# EAGLE board EvaporometerLite (EAGLE 9.5.2)

Size 160 x 100 mm. Coordinates in mm from the lower left corner, seen from the top.
Outline: 0,0 160,0 160,100 0,100 0,0
Copper layers (1*16): Top 0.035mm / dielectric 1.5mm / Bottom 0.035mm
Design rules "default": minimum track width 6mil, minimum drill 0.35mm, track to track 6mil, track to pad 6mil, pad to pad 6mil, via to via 6mil, smd to smd 6mil, copper to edge 40mil, drill to drill 6mil, minimum pad ring 10mil, minimum via ring 8mil, stop-mask expansion 4mil, vias tented up to drill 0mil, thermal gap 10mil

## Footprints (pad centres in the part's own frame; a part is rotated, then mirrored left to right if it is on the bottom)
SJ = smd 1.168 x 1.6: 1 -0.762,0; 2 0.762,0
1X10 = drill 1.016 long: 1 -11.43,0; 2 -8.89,0; 3 -6.35,0; 4 -3.81,0; 5 -1.27,0; 6 1.27,0; 7 3.81,0; 8 6.35,0; 9 8.89,0; 10 11.43,0
0805 = smd 1.3 x 1.5: 1 -0.95,0; 2 0.95,0
FIDUCIAL_1MM = smd 1 x 1: 1 0,0
MSOP10 = smd 0.25 x 1: 1 -1,-2.113; 2 -0.5,-2.113; 3 0,-2.113; 4 0.5,-2.113; 5 1,-2.113; 6 1,2.113; 7 0.5,2.113; 8 0,2.113; 9 -0.5,2.113; 10 -1,2.113
MOUNTINGHOLE_2.5_PLATED = drill 2.5 pad 3.2: P$1 0,0
1X01 = drill 1.016 octagon: 1 0,0
SMD2,54-5,08 = smd 2.54 x 5.08: 1 0,0
SO16-1 = smd 0.762 x 1.524: 1 -4.445,-4.775; 2 -3.175,-4.775; 3 -1.905,-4.775; 4 -0.635,-4.775; 5 0.635,-4.775; 6 1.905,-4.775; 7 3.175,-4.775; 8 4.445,-4.775; 9 4.445,4.775; 10 3.175,4.775; 11 1.905,4.775; 12 0.635,4.775; 13 -0.635,4.775; 14 -1.905,4.775; 15 -3.175,4.775; 16 -4.445,4.775
1X06 = drill 1.016 long: 1 -6.35,0; 2 -3.81,0; 3 -1.27,0; 4 1.27,0; 5 3.81,0; 6 6.35,0
1X04 = drill 1.016 long: 1 -3.81,0; 2 -1.27,0; 3 1.27,0; 4 3.81,0
R1206 = smd 1.6 x 1.803: 1 -1.422,0; 2 1.422,0
DS-01 = drill 0.813 long: 1 0,-3.81; 2 0,3.81
SJ_2W = smd 1.27 x 2.54: 1 -2.54,0; 2 0,0; 3 2.54,0

## Placement (x,y rotation side)
0X4A  [SJ]  -52.07,59.69 0 top  (outside the outline)
0X4B  [SJ]  -16.51,64.77 0 top  (outside the outline)
0X48  [SJ]  -22.86,64.77 0 top  (outside the outline)
0X49  [SJ]  -29.21,64.77 0 top  (outside the outline)
2.5V_OUT  [SJ]  -20.32,59.69 0 top  (outside the outline)
5V_OUT  [SJ]  -39.37,59.69 0 top  (outside the outline)
10V_OUT  [SJ]  -30.48,59.69 0 top  (outside the outline)
ADS1  [1X10]  6.35,19.05 90 top
ADS1115-1:C1  1µF  [0805]  -50.8,12.7 0 top  (outside the outline)
ADS1115-1:C2  1µF  [0805]  -22.86,16.51 0 top  (outside the outline)
ADS1115-1:FB1  MMZ2012Y152B  [0805]  -24.13,12.7 0 top  (outside the outline)
ADS1115-1:FB2  MMZ2012Y152B  [0805]  -38.1,12.7 0 top  (outside the outline)
ADS1115-1:FID1  FIDUCIAL""  [FIDUCIAL_1MM]  -39.37,19.05 0 top  (outside the outline)
ADS1115-1:FID2  FIDUCIAL""  [FIDUCIAL_1MM]  -41.91,19.05 0 top  (outside the outline)
ADS1115-1:R1  10K  [0805]  -35.56,16.51 0 top  (outside the outline)
ADS1115-1:R3  10K  [0805]  -48.26,16.51 0 top  (outside the outline)
ADS1115-1:R4  10K  [0805]  -22.86,20.32 0 top  (outside the outline)
ADS1115-1:R5  10K  [0805]  -35.56,20.32 0 top  (outside the outline)
ADS1115-1:U1  ADS1115IDGST  [MSOP10]  -16.51,3.81 0 top  (outside the outline)
ADS1115-1:U$13  MOUNTINGHOLE2.5  [MOUNTINGHOLE_2.5_PLATED]  -21.59,2.54 0 top  (outside the outline)
ADS1115-1:U$14  MOUNTINGHOLE2.5  [MOUNTINGHOLE_2.5_PLATED]  -26.67,2.54 0 top  (outside the outline)
BRIDGE+_TSTPD  [1X01]  -27.94,49.53 0 top  (outside the outline)
DIP_SLEEP  [SJ]  -26.67,54.61 0 top  (outside the outline)
EXT_SUPP  [SJ]  -38.1,54.61 0 top  (outside the outline)
GND_TSTPD  WIREPADSMD2,54-5,08  [SMD2,54-5,08]  -20.32,25.4 0 top  (outside the outline)
IC1  INA125U  [SO16-1]  33.02,22.86 90 top
JP1  [1X06]  6.35,58.42 90 top
LOADCELL1  [1X04]  -19.05,44.45 0 top  (outside the outline)
R2  [R1206]  -15.24,54.61 0 top  (outside the outline)
S1  [DS-01]  -15.24,27.94 0 top  (outside the outline)
SEL_EXT_SUPP  [SJ_2W]  -36.83,44.45 0 top  (outside the outline)
SLEEP  [1X01]  -50.8,49.53 0 top  (outside the outline)
V_OUT_TSTPD  [1X01]  -43.18,49.53 0 top  (outside the outline)
VBG_OUT  [SJ]  -48.26,54.61 0 top  (outside the outline)
VREF  [SJ]  -45.72,59.69 0 top  (outside the outline)

## Library data of the parts
0X4A 0X4B 0X48 0X49 2.5V_OUT 5V_OUT 10V_OUT DIP_SLEEP EXT_SUPP SEL_EXT_SUPP VBG_OUT VREF = jumper
ADS1 BRIDGE+_TSTPD JP1 LOADCELL1 SLEEP V_OUT_TSTPD = pinhead
ADS1115-1:C1 ADS1115-1:C2 ADS1115-1:FB1 ADS1115-1:FB2 ADS1115-1:FID1 ADS1115-1:FID2 ADS1115-1:R1 ADS1115-1:R3-ADS1115-1:R5 ADS1115-1:U1 ADS1115-1:U$13 ADS1115-1:U$14 = microbuilder
GND_TSTPD = wirepad
IC1 = burr-brown; MF: TEXAS INSTRUMENT CONNECTORS; MPN: INA125U; OC_FARNELL: 1304375; OC_NEWARK: 80K5901
R2 = rcl; SPICEPREFIX: R
S1 = switch-dil; OC_FARNELL: unknown; OC_NEWARK: unknown

## Nets
A1: ADS1.8 ADS1115-1:U1.5
A2: ADS1.9 ADS1115-1:U1.6
A3: ADS1.10 ADS1115-1:U1.7
A+: IC1.6 LOADCELL1.1
A-: IC1.7 LOADCELL1.4
ADDR: 0X4A.2 0X4B.2 0X48.2 0X49.2 ADS1.5 ADS1115-1:R4.1 ADS1115-1:U1.1 JP1.5
ADS1115-1:GND: ADS1115-1:C1.1 ADS1115-1:FB2.2 ADS1115-1:R4.2 ADS1115-1:U1.3
ADS1115-1:VDD: ADS1115-1:C1.2 ADS1115-1:FB1.2 ADS1115-1:R1.1 ADS1115-1:R3.1 ADS1115-1:R5.1 ADS1115-1:U1.8
ALERT: ADS1.6 ADS1115-1:R5.2 ADS1115-1:U1.2
BRIDGE+: BRIDGE+_TSTPD.1 EXT_SUPP.1 LOADCELL1.2 VREF.1
GND: 0X48.1 ADS1.2 ADS1115-1:C2.2 ADS1115-1:FB2.1 GND_TSTPD.1 IC1.3 IC1.5 IC1.12 JP1.2 LOADCELL1.3 S1.1
N$16: JP1.6 SEL_EXT_SUPP.3
N$22: DIP_SLEEP.2 R2.1 S1.2
RG+: IC1.8
RG-: IC1.9
SCL: 0X4B.1 ADS1.3 ADS1115-1:R1.2 ADS1115-1:U1.10 JP1.3
SDA: 0X4A.1 ADS1.4 ADS1115-1:R3.2 ADS1115-1:U1.9 JP1.4
SLEEP: DIP_SLEEP.1 IC1.2 SLEEP.1
V_OUT: ADS1.7 ADS1115-1:U1.4 IC1.10 IC1.11 V_OUT_TSTPD.1
V_SUPP: 0X49.1 ADS1.1 ADS1115-1:C2.1 ADS1115-1:FB1.1 IC1.1 JP1.1 R2.2 SEL_EXT_SUPP.1
VREF_2.5V: 2.5V_OUT.2 IC1.14
VREF_5V: 5V_OUT.2 IC1.15
VREF_10V: 10V_OUT.2 IC1.16
VREF_BG: IC1.13 VBG_OUT.2
VREF_EXT: EXT_SUPP.2 SEL_EXT_SUPP.2
VREF_OUT: 2.5V_OUT.1 5V_OUT.1 10V_OUT.1 IC1.4 VBG_OUT.1 VREF.2

## Tracks (layer width: path | path; a pad name or v marks a point on that pad's centre or on a via)
A1  (1 unrouted)
A2  (1 unrouted)
A3  (1 unrouted)
A+  (1 unrouted)
A-  (1 unrouted)
ADDR  (7 unrouted)
ADS1115-1:GND  (3 unrouted)
ADS1115-1:VDD  (5 unrouted)
ALERT  (2 unrouted)
BRIDGE+  (3 unrouted)
GND  (10 unrouted)
N$16  (1 unrouted)
N$22  (2 unrouted)
SCL  (4 unrouted)
SDA  (4 unrouted)
SLEEP  (2 unrouted)
V_OUT  (4 unrouted)
V_SUPP  (7 unrouted)
VREF_2.5V  (1 unrouted)
VREF_5V  (1 unrouted)
VREF_10V  (1 unrouted)
VREF_BG  (1 unrouted)
VREF_EXT  (1 unrouted)
VREF_OUT  (5 unrouted)